# Altium PCB 3EWL1-200001_panelize.PcbDoc
Units mm, origin at the board's own origin, x right, y up, seen from the top; angles counter-clockwise.
Board outline 100 x 137 mm, 2 copper layers (Top Layer, Bottom Layer), stack 1.57 mm thick; 3 components, 0 nets, 10 pads, 0 vias.
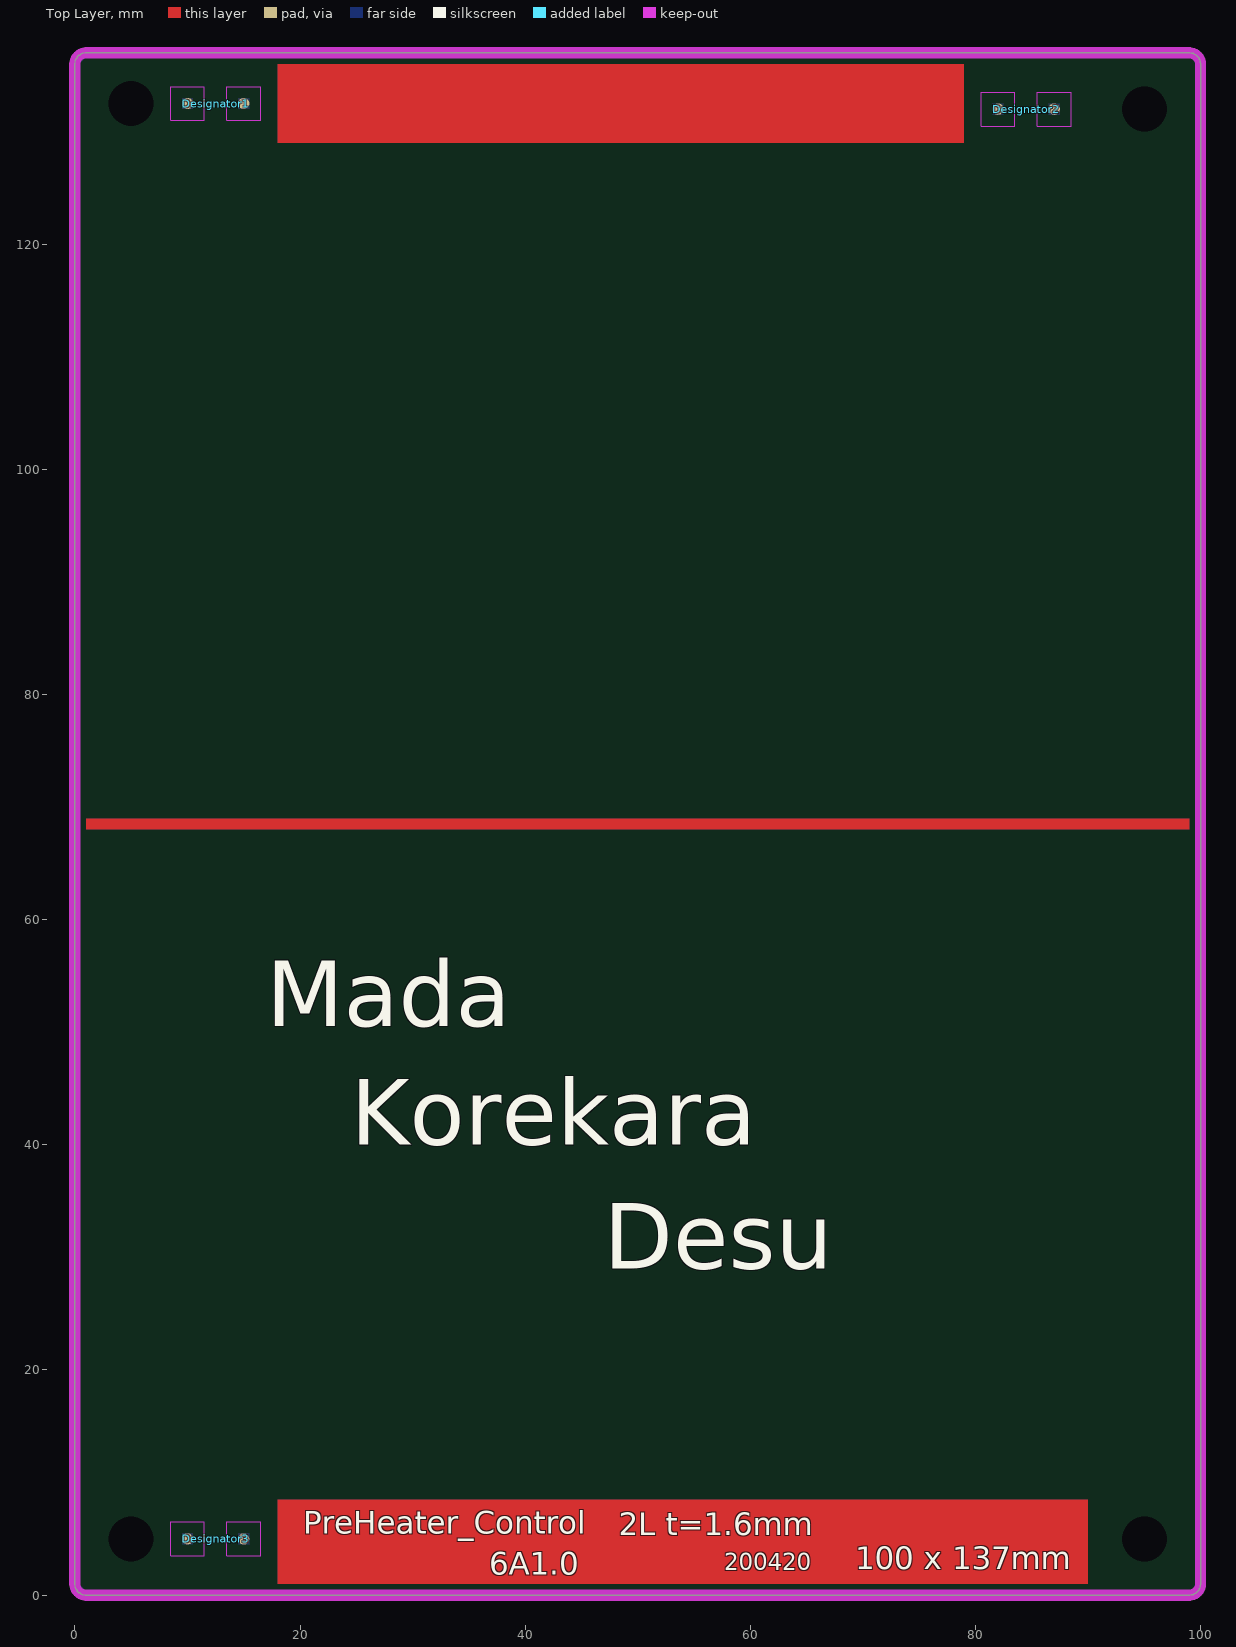
[diagram p0: Top Layer view]
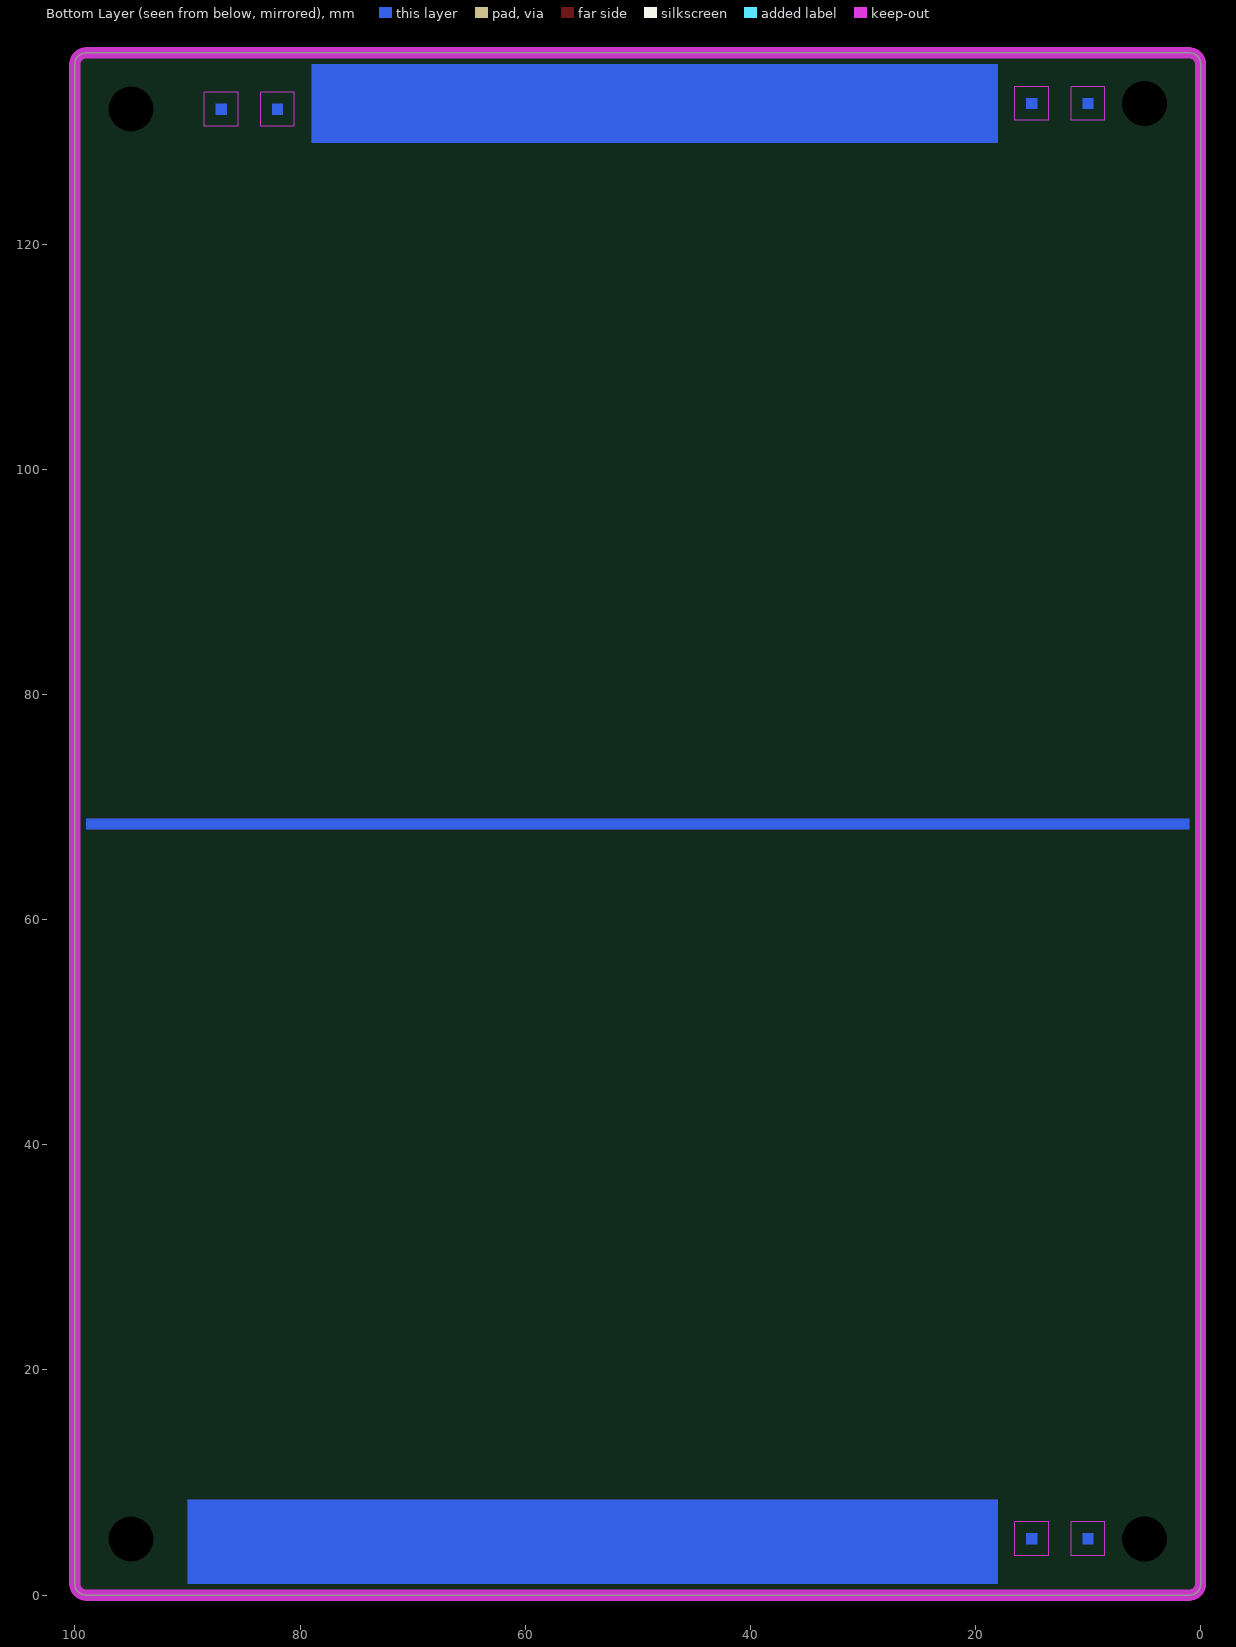
[diagram p1: Bottom Layer view, seen from below]

## Layer stack, top to bottom
Top Solder: solder mask 0.02, Solder Resist, Dk 3.5
Top Layer: signal copper 0.035
Dielectric2: core 1.5, FR-4, Dk 4.2
Bottom Layer: signal copper 0.035
Bottom Solder: solder mask 0.02, Solder Resist, Dk 3.5

## Board outline
0,1 0,136 cw(c1,136) 1,137 99,137 cw(c99,136) 100,136 100,1 cw(c99,1) 99,0 1,0 cw(c1,1)

## Design rules (kind name [scope] priority, off if disabled: settings)
Clearance [All] p1: gap=0.2 ignorepadtopadclearanceinfootprint=TRUE except(0: Arc-Hole Track-Hole SMDPad-Hole THPad-Hole Via-Hole Fill-Hole Poly-Hole Region-Hole Text-Hole)
ComponentClearance [All] p1 off: gap=0.254 collisioncheckmode=3 verticalgap=0.254 showdistances=FALSE
FabricationTestPointUsage TestPointUsage [All] p1 off: valid=0 allowmultiple=FALSE
FabricationTestpoint Testpoint [All] p1 off: side=3 testpointundercomponent=TRUE minsize=1.016 maxsize=2.54 preferedsize=1.524 minholesize=0 maxholesize=1.016 preferedholesize=0.813 testpointgrid=0.025 allowsidetop=TRUE allowsidebottom=TRUE usegrid=TRUE gridtolerance=0
Height [All] p1 off: minheight=0 maxheight=25.4 prefheight=12.7
HoleSize [All] p1: absolutevalues=TRUE maxlimit=4 minlimit=0 maxpercent=80.000 minpercent=20.000
LayerPairs [All] p1 off: enforce=TRUE
MinimumSolderMaskSliver [All] p1: minsoldermaskwidth=0.076
PasteMaskExpansion [All] p1 off: expansion=0
PlaneClearance [All] p1: clearance=0.4
PlaneConnect [All] p1: planeconnectstyle=Direct reliefexpansion=0.508 reliefentries=4 reliefconductorwidth=0.254 reliefairgap=0.254
PolygonConnect PolygonConnect_1 [IsVia] p1: connectstyle=Direct reliefconductorwidth=0.254 reliefentries=4 polygonreliefangle="90 Angle" airgapwidth=0.254
PolygonConnect [All] p2: connectstyle=Direct reliefconductorwidth=0.5 reliefentries=4 polygonreliefangle="90 Angle" airgapwidth=0.2
RoutingCorners [All] p1 off: cornerstyle=45-Degree minsetback=2.54 maxsetback=2.54
RoutingVias [All] p1: holewidth=0.3 width=0.6 viastyle="Through Hole" minholewidth=0.3 minwidth=0.6 maxholewidth=1.2 maxwidth=1.7
ShortCircuit Short_GND [WithinRoom('Room_GND')] p1: allowed=TRUE
ShortCircuit [All] p2: allowed=FALSE
SilkToSilkClearance [All] p1: silktosilkclearance=0.05
SilkToSolderMaskClearance SilkscreenOverComponentPads [IsPad] p1: minsilkscreentomaskgap=0.1 clearancetoexposedcopper=TRUE
SolderMaskExpansion SolderMaskExpansion_1 [All] p1: expansion=0.05 istentingtop=FALSE
SolderMaskExpansion [All] p2 off: expansion=0.05 istentingtop=FALSE
UnRoutedNet [All] p1: checkbadconnections=TRUE
Width [All] p1: maxlimit=10 minlimit=0.1 preferedwidth=0.1
15 further rules are at their usual default settings.

## Components (designator, comment, footprint, x,y, rotation, side; value= is the part's Value field where it differs from the comment)
Designator1 "FIDUCIAL_MARK3" FIDUCIAL_MARK3#1 10,132.5 r0 top
Designator2 "FIDUCIAL_MARK3" FIDUCIAL_MARK3#2 82,132 r0 top
Designator3 "FIDUCIAL_MARK3" FIDUCIAL_MARK3#1 10,5 r0 top

## Footprints (in the part's own frame and the unit in brackets; to place one, negate y for a bottom-side part, rotate by r counter-clockwise, add the part's x,y. Pads: shape width x height; smd on the part's side, far side on the other; paste and mask are expansions set on the pad)
FIDUCIAL_MARK3#1 [mm]
  round 1 smd: 0(0,0)
  round 1 smd paste-1: 0(5,0)
  Bottom Layer region: -0.5,-0.5 0.5,-0.5 0.5,0.5 -0.5,0.5
  Bottom Layer region: 4.5,-0.5 5.5,-0.5 5.5,0.5 4.5,0.5
  Keep-Out Layer lines w0.1: -1.5,-1.5 -1.5,1.5 1.5,1.5 1.5,-1.5 -1.5,-1.5 ; 3.5,-1.5 6.5,-1.5 6.5,1.5 3.5,1.5 3.5,-1.5
FIDUCIAL_MARK3#2 [mm]
  round 1 smd paste-1: 0(0,0) 0(5,0)
  Bottom Layer region: 4.5,-0.5 5.5,-0.5 5.5,0.5 4.5,0.5
  Bottom Layer region: -0.5,-0.5 0.5,-0.5 0.5,0.5 -0.5,0.5
  Keep-Out Layer lines w0.1: -1.5,-1.5 1.5,-1.5 1.5,1.5 -1.5,1.5 -1.5,-1.5 ; 3.5,-1.5 3.5,1.5 6.5,1.5 6.5,-1.5 3.5,-1.5

## Free pads (board coordinates)
  rrect50% 0x0 hole 4 unplated: 0(5,132.5) 0(5,5) 1(95,5) 1(95,132)

## Nets (pads, with @x,y where several pads share a name; then routed paths per layer and width w, separated by ;. In a path a pad name is that pad's centre, name@x,y a point inside that pad or via, vN(x,y) a via of type N, cw(c..) or ccw(c..) an arc to the next point about the centre after c; other vN are vias at no path point)
pads on no net: Designator1.0 Designator2.0 Designator3.0

## Polygon pours and split planes (outlines as drawn)
no net on Top Layer "Top Layer-PGND3" (hatched Horizontal grid 0.1 track 0.15, pour order 449): -8.997,44.297
no net on Top Layer "Top Layer-DGND 1" (hatched Horizontal grid 0.1 track 0.15, pour order 413): 6.347,12.6
no net on Top Layer "Top Layer-No Net 2" (hatched Horizontal grid 0.1 track 0.15, pour order 383): 13.707,70.8
no net on Top Layer "Top Layer-VPP 7" (hatched Horizontal grid 0.1 track 0.15, pour order 379): 13.55,67.352
no net on Top Layer "Top Layer-VPP 9" (hatched Horizontal grid 0.1 track 0.15, pour order 371): 4.2,71.259
no net on Top Layer "+3.3" (hatched Horizontal grid 0.1 track 0.15, pour order 273): 24.895,63.417
no net on Top Layer "+3.3" (hatched Horizontal grid 0.1 track 0.15, pour order 271): 38.1,75.25
no net on Top Layer "+3.3" (hatched Horizontal grid 0.1 track 0.15, pour order 270): 38.1,75.25
no net on Top Layer "Top Layer-+VCC_BGMcore" (hatched Horizontal grid 0.1 track 0.15, pour order 267): 33.422,75.1
no net on Top Layer "Top Layer-+VCC_BGMcore 1" (hatched Horizontal grid 0.1 track 0.15, pour order 266): 33.422,75.1
no net on Top Layer "Top Layer-NetC603_1 1" (hatched Horizontal grid 0.1 track 0.15, pour order 259): 30.7,75.1
no net on Top Layer "Top Layer-No Net" (hatched Horizontal grid 0.1 track 0.15, pour order 257): 29.867,75.05
no net on Top Layer "Top Layer-No Net 1" (hatched Horizontal grid 0.1 track 0.15, pour order 256): 31.4,74.6
no net on Bottom Layer "+3.3" (hatched Horizontal grid 0.1 track 0.15, pour order 272): 6,52.01
no net on Drill Drawing (hatched Horizontal grid 0.1 track 0.15): 27.017,15.679
no net on M14_B_PartBody (hatched Horizontal grid 0.1 track 0.15): 9.795,15.99
no net on M14_B_PartBody (hatched Horizontal grid 0.1 track 0.15): 9.795,15.99
no net on M14_B_PartBody (hatched Horizontal grid 0.1 track 0.15): 14.285,26.5
no net on M16_B_Occupied (hatched Horizontal grid 0.1 track 0.15): -8.8,32.434
no net on M2_Outline_Panel (hatched Horizontal grid 0.1 track 0.15): 18.4,24.9

## Keep-outs
Keep-Out Layer:
  lines w1: 100,1 cw(c99,1) 99,0 1,0 cw(c1,1) 0,1 0,136 cw(c1,136) 1,137 99,137 cw(c99,136) 100,136 100,1 ; 100,1 100,1

## Other copper
Top Layer:
  rectangle: 1,68 99,69
  rectangle: 18,129 79,136
  rectangle: 18,1 90,8.5
  text "Layer1(GTL)" at 105.559,39.071 h1.5
Bottom Layer:
  rectangle: 1,68 99,69
  rectangle: 18,1 90,8.5
  rectangle: 18,129 79,136
  text "Layer2(GBL)" at 105.559,23.071 h1.5

## Silkscreen, mask and mechanical layers (free items; w line width, h text height)
Top Overlay:
  text "Mada" at 17,48.605 h10
  text "Korekara" at 24.5,38.105 h10
  text "L1_Overlay" at 105.559,36.571 h1.5
  text "Desu" at 47,27.105 h10
  text "PreHeater_Control" at 20.3,5.467 h2
  text "2L t=1.6mm" at 48.3,5.3 h2
  text "100 x 137mm" at 69.3,2.3 h2
  text "200420" at 57.7,2.2 h1.5
  text "6A1.0" at 36.8,1.8 h2
Bottom Overlay:
  text "L2_Overlay" at 105.559,20.571 h1.5
Top Paste:
  text "Top_Paste (GTP)" at 119.059,39.071 h1.5
Bottom Paste:
  text "Bottom_Paste (GBP)" at 119.059,23.071 h1.5
Top Solder:
  text "L1_SolderResist (GTS)" at 105.559,34.071 h1.5
Bottom Solder:
  text "L2_SolderResist (GBS)" at 105.559,18.071 h1.5
M1_Outline_PCB:
  text "Outline (GML)" at 105.559,42.071 h1.5
M2_Outline_Panel:
  the board outline again, w0.2
M3_Vcut:
  lines w0.254: -27,10 110.7,10 ; -23,66 107.8,66 ; -22.9,71 108,71 ; -21,127 109.8,127
  text "V-Scoring" at -19.8,127.7 h1.5
  text "V-Scoring" at -19.8,71.7 h1.5
  text "V-Scoring" at -19.8,66.7 h1.5
  text "V-Scoring" at -21.8,10.7 h1.5
M4_NCcut:
  text "NC-Router (GM4)" at 105.559,44.571 h1.5

## Text inside footprints (layer, text, board x,y; h text height)
Designator1: M15_T_Occupied "5mm" at 11.25,135.75 h1
Designator2: M15_T_Occupied "5mm" at 83.25,135.25 h1
Designator3: M15_T_Occupied "5mm" at 11.25,8.25 h1